# Altium PCB ADCin.PcbDoc
Units mm, origin at the board's own origin, x right, y up, seen from the top; angles counter-clockwise.
Board outline 23.37 x 31.11 mm, 2 copper layers (Top Layer, Bottom Layer), stack 1.271 mm thick; 2 components, 3 nets, 23 pads, 0 vias.
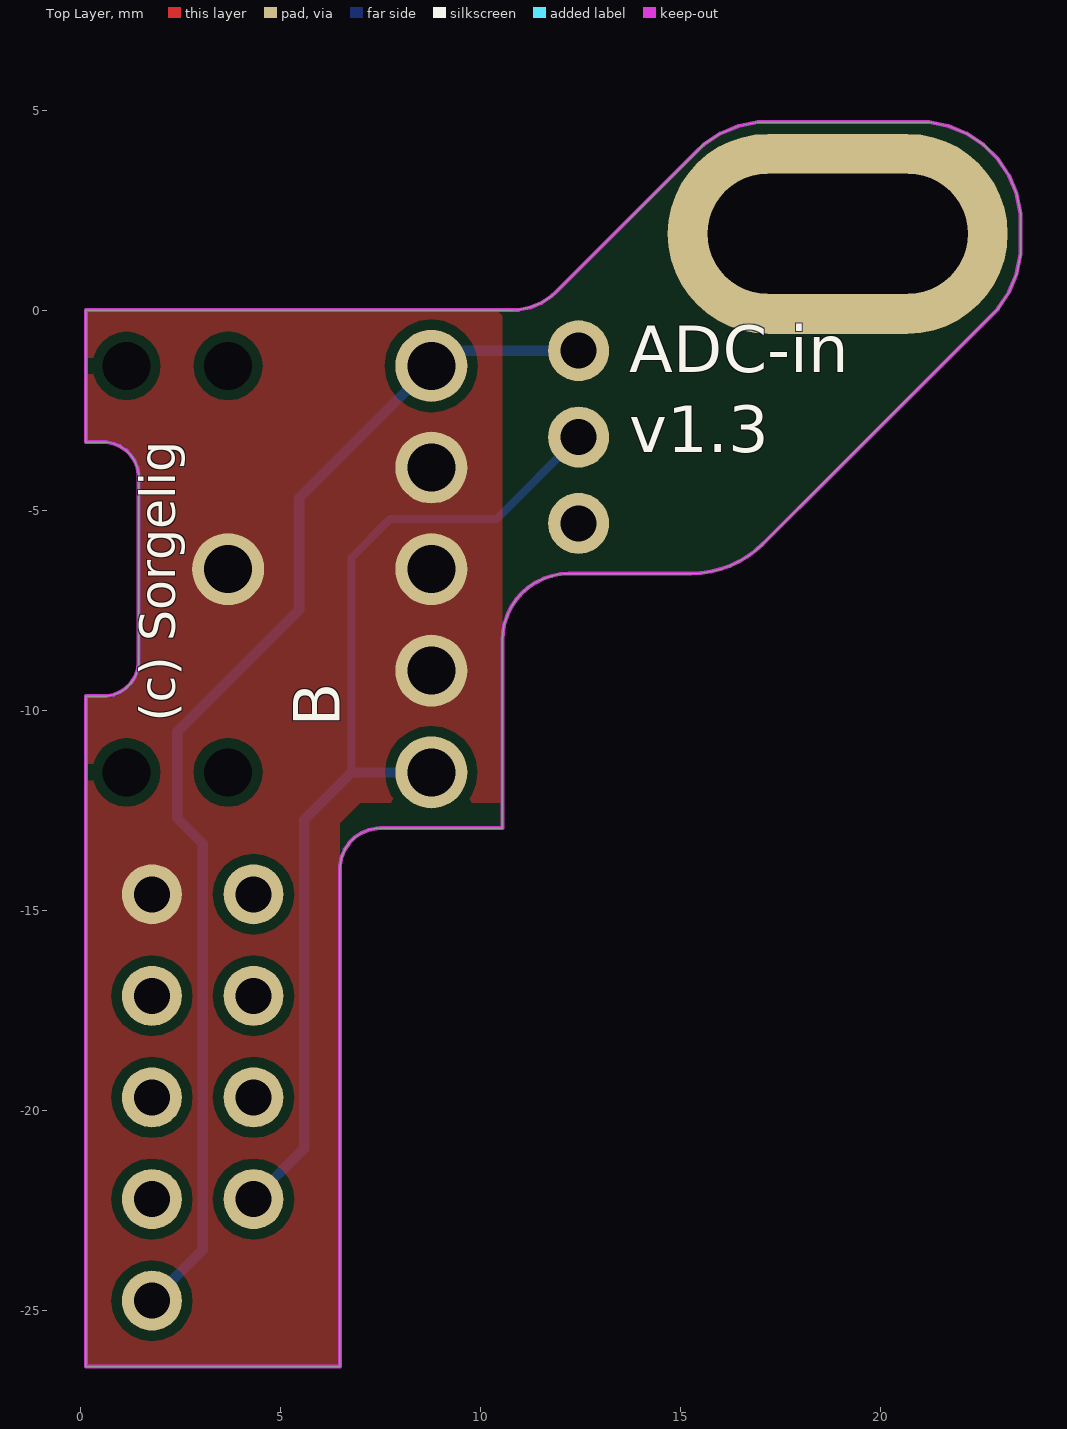
[diagram p0: Top Layer view]
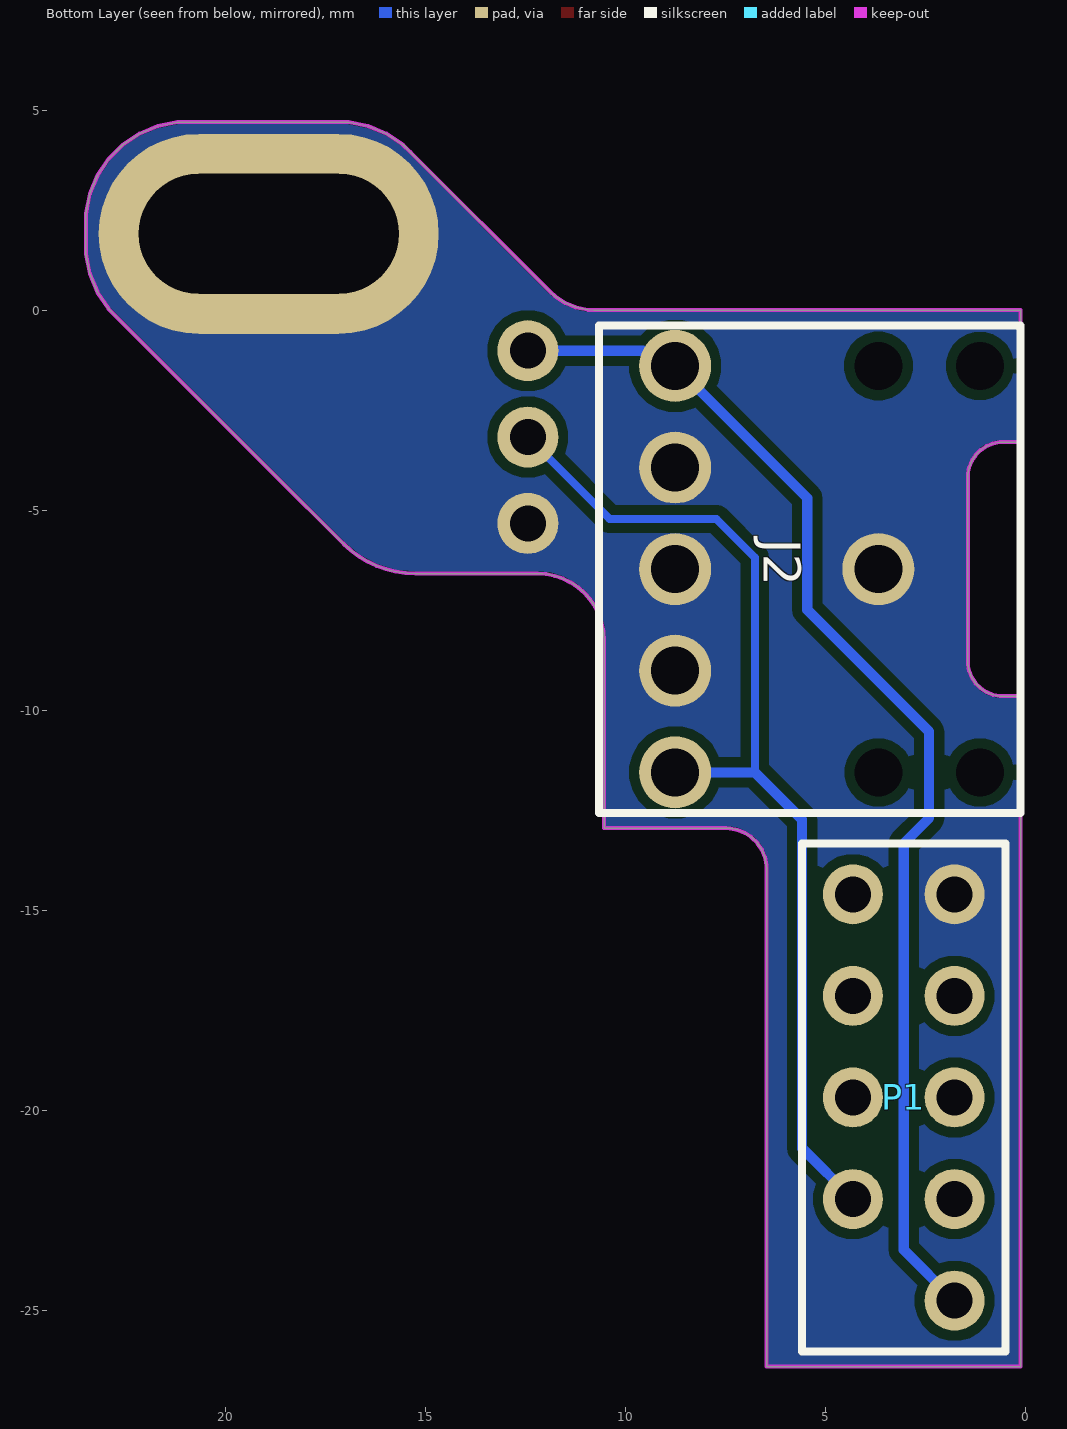
[diagram p1: Bottom Layer view, seen from below]

## Layer stack, top to bottom
Top Solder: solder mask 0.0102, Solder Resist, Dk 3.5
Top Layer: signal copper 0.0356
Dielectric 1: dielectric 1.2, FR-4, Dk 4.8
Bottom Layer: signal copper 0.0356
Bottom Solder: solder mask 0.0102, Solder Resist, Dk 3.5

## Board outline
15.258,-6.586 ccw(c15.258,-4.046) 17.054,-5.842 18.814,-4.082 22.751,-0.145 22.928,0.032 23.206,0.448 23.397,0.91 23.495,1.401 23.495,1.651 23.495,2.159 23.495,2.409 23.397,2.9 23.206,3.362 22.928,3.778 22.574,4.132 22.158,4.41 21.696,4.601 21.205,4.699 20.955,4.699 17.181,4.699 16.931,4.699 16.44,4.601 15.978,4.41 15.562,4.132 15.385,3.955 11.879,0.449 11.768,0.348 11.518,0.181 11.24,0.066 10.945,0.007 10.795,0 0.127,0 0.127,-3.302 0.646,-3.302 0.818,-3.336 0.979,-3.403 1.125,-3.5 1.249,-3.624 1.346,-3.77 1.413,-3.932 1.447,-4.103 1.447,-4.191 1.447,-8.763 1.447,-8.851 1.413,-9.022 1.346,-9.184 1.249,-9.33 1.125,-9.454 0.979,-9.551 0.818,-9.618 0.646,-9.652 0.127,-9.652 0.127,-26.416 6.477,-26.416 6.477,-13.97 6.482,-13.87 6.521,-13.675 6.597,-13.491 6.708,-13.325 6.848,-13.185 7.014,-13.074 7.198,-12.998 7.393,-12.959 7.493,-12.954 10.541,-12.954 10.541,-8.255 cw(c12.21,-8.255) 12.21,-6.586

## Design rules (kind name [scope] priority, off if disabled: settings)
BoardOutlineClearance [All] p1: gap=0 ignorepadtopadclearanceinfootprint=FALSE
Clearance keep-out_Clearance [OnLayer('Keep-Out Layer')] p1: gap=0 ignorepadtopadclearanceinfootprint=TRUE
Clearance [All] p2: gap=0.254 ignorepadtopadclearanceinfootprint=TRUE except(0: Arc-Hole Track-Hole SMDPad-Hole THPad-Hole Via-Hole Fill-Hole Poly-Hole Region-Hole Text-Hole)
ComponentClearance [All] p1 off: gap=0.254 collisioncheckmode=3 verticalgap=0.254 showdistances=FALSE
DiffPairsRouting [All] p1: maxlimit=0.254 minlimit=0.254 mostfreqgap=0.254 toplayer_minwidth=0.381 toplayer_maxwidth=0.381 toplayer_prefwidth=0.381 bottomlayer_minwidth=0.381 bottomlayer_maxwidth=0.381 bottomlayer_prefwidth=0.381 substack1={E4E31694-489D-4C8D-B382-0CE1957CDCA8} toplayer_{e4e31694-489d-4c8d-b382-0ce1957cdca8}_minwidth=0.381 toplayer_{e4e31694-489d-4c8d-b382-0ce1957cdca8}_maxwidth=0.381 toplayer_{e4e31694-489d-4c8d-b382-0ce1957cdca8}_prefwidth=0.381 bottomlayer_{e4e31694-489d-4c8d-b382-0ce1957cdca8}_minwidth=0.381 bottomlayer_{e4e31694-489d-4c8d-b382-0ce1957cdca8}_maxwidth=0.381 bottomlayer_{e4e31694-489d-4c8d-b382-0ce1957cdca8}_prefwidth=0.381 maxuncoupledlength=12.7
Height [All] p1 off: minheight=0 maxheight=25.4 prefheight=12.7
HoleSize [All] p1: absolutevalues=TRUE maxlimit=5 minlimit=0.025 maxpercent=80.000 minpercent=20.000
MinimumSolderMaskSliver [All] p1: minsoldermaskwidth=0.127
PolygonConnect PolygonConnect_comp [HasFootprint('C0805')] p1: connectstyle=Relief reliefconductorwidth=0.508 reliefentries=4 polygonreliefangle="90 Angle" airgapwidth=0.254
PolygonConnect PolygonConnect_comp_2 [HasFootprint('microsd')] p2: connectstyle=Relief reliefconductorwidth=0.508 reliefentries=4 polygonreliefangle="90 Angle" airgapwidth=0.254
PolygonConnect PolygonConnect_comp_3 [HasFootprint('tact 12x12')] p3: connectstyle=Relief reliefconductorwidth=0.508 reliefentries=4 polygonreliefangle="90 Angle" airgapwidth=0.254
PolygonConnect PolygonConnect_comp_1 [HasFootprint('TACT_60X35')] p4: connectstyle=Relief reliefconductorwidth=0.508 reliefentries=4 polygonreliefangle="90 Angle" airgapwidth=0.254
PolygonConnect [All] p5: connectstyle=Direct reliefconductorwidth=0.254 reliefentries=4 polygonreliefangle="90 Angle" airgapwidth=0.254
RoutingVias [All] p1: holewidth=0.4 width=0.9 viastyle="Through Hole" minholewidth=0.4 minwidth=0.9 maxholewidth=0.4 maxwidth=1
SilkToSilkClearance [All] p1 off: silktosilkclearance=0.254
SilkToSolderMaskClearance [IsPad] p1 off: minsilkscreentomaskgap=0.254 clearancetoexposedcopper=TRUE
SolderMaskExpansion SolderMaskExpansion_J1 [InComponent('J1')] p1: expansion=0 istentingtop=FALSE
SolderMaskExpansion [All] p2: expansion=0.051 istentingtop=FALSE
Width Width_power [InNetClass('power')] p1: maxlimit=2 minlimit=0.254 preferedwidth=0.508 substack1={E4E31694-489D-4C8D-B382-0CE1957CDCA8} minimp=50.000000 maximp=50.000000 favimp=50.000000
Width Width_signal [All] p2: maxlimit=0.254 minlimit=0.127 preferedwidth=0.254 substack1={E4E31694-489D-4C8D-B382-0CE1957CDCA8} toplayer_{e4e31694-489d-4c8d-b382-0ce1957cdca8}_minwidth=0.254 bottomlayer_{e4e31694-489d-4c8d-b382-0ce1957cdca8}_minwidth=0.254
23 further rules are at their usual default settings.

## Components (designator, comment, footprint, x,y, rotation, side; value= is the part's Value field where it differs from the comment)
J2 "Audio" phonejack 0.127,-6.477 r270 bottom locked
P1 "Header 5X2" HDR2X5 4.318,-24.765 r90 bottom locked

## Footprints (in the part's own frame and the unit in brackets; to place one, negate y for a bottom-side part, rotate by r counter-clockwise, add the part's x,y. Pads: shape width x height; smd on the part's side, far side on the other; paste and mask are expansions set on the pad)
HDR2X5 [mm] "Connector; Header; 5x2 Position"
  round 1.5 hole 0.9: 2(0,-2.54) 3(2.54,0) 4(2.54,-2.54) 5(5.08,0) 6(5.08,-2.54) 7(7.62,0) 8(7.62,-2.54) 9(10.16,0) 10(10.16,-2.54)
  silkscreen extent -1.27,-3.81 11.43,1.27
phonejack [mm]
  round 1.8 hole 1.2: 1(0,-8.636) 1(0,-3.556) 2(-5.08,-8.636) 3(2.54,-8.636) 4(5.08,-8.636) 5(-2.54,-8.636)
  round 1 hole 1.2 unplated: ""(-5.08,-3.556) ""(-5.08,-1.016) ""(5.08,-3.556) ""(5.08,-1.016)
  silkscreen extent -6.1,-10.54 6.1,0, body extent -6,-11.1 6,2.9, height 5.53

## Part data
J2: library part phonejack
P1: "Header, 5-Pin, Dual row", LatestRevisionDate=17-Jul-2002, LatestRevisionNote="Re-released for DXP Platform.", Publisher="Altium Limited"

## Free pads (board coordinates)
  oval 8.5x5 hole 3 slot 6.5 at 0 deg: 2(18.923,1.905)
  round 1.524 hole 0.9: 4(12.446,-5.334) 4(12.446,-3.175) 4(12.446,-1.016)

## Nets (pads, with @x,y where several pads share a name; then routed paths per layer and width w, separated by ;. In a path a pad name is that pad's centre, name@x,y a point inside that pad or via, vN(x,y) a via of type N, cw(c..) or ccw(c..) an arc to the next point about the centre after c; other vN are vias at no path point)
GND: J2.1 J2.3 J2.5 P1.10 pad.2 pad.4@12.446,-5.334
NetJ2_2: J2.2 P1.2 pad.4@12.446,-1.016 | length 30.6
  Bottom Layer w0.254: P1.2 3.048,-23.495 3.048,-13.335 2.413,-12.7 2.413,-10.541 5.461,-7.493 5.461,-4.699 J2.2 9.181,-1.397 9.562,-1.016 pad.4@12.446,-1.016
NetJ2_4: J2.4 P1.3 pad.4@12.446,-3.175 | length 26
  Bottom Layer w0.2: 6.772,-11.557 6.772,-6.184 7.733,-5.223 10.398,-5.223 pad.4@12.446,-3.175
  Bottom Layer w0.254: P1.3 5.588,-20.955 5.588,-12.741 6.772,-11.557 J2.4
pads on no net: J2. P1.4 P1.5 P1.6 P1.7 P1.8 P1.9

## Polygon pours and split planes (outlines as drawn)
GND on Top Layer "ground" (solid, remove dead copper, pour order 38): 6.477,-12.827 6.985,-12.319 10.541,-12.319 10.541,0 0,0 0,-26.416 6.477,-26.416
GND on Bottom Layer "GND_L02_P039" (solid, remove dead copper, pour order 39): 15.258,-6.586 ccw(c15.258,-4.046) 17.054,-5.842 18.814,-4.082 22.751,-0.145 22.928,0.032 23.206,0.448 23.397,0.91 23.495,1.401 23.495,1.651 23.495,2.159 23.495,2.409 23.397,2.9 23.206,3.362 22.928,3.778 22.574,4.132 22.158,4.41 21.696,4.601 21.205,4.699 20.955,4.699 17.181,4.699 16.931,4.699 16.44,4.601 15.978,4.41 15.562,4.132 15.385,3.955 11.879,0.449 11.768,0.348 11.518,0.181 11.24,0.066 10.945,0.007 10.795,0 0.127,0 0.127,-3.302 0.646,-3.302 0.818,-3.336 0.979,-3.403 1.125,-3.5 1.249,-3.624 1.346,-3.77 1.413,-3.932 1.447,-4.103 1.447,-4.191 1.447,-8.763 1.447,-8.851 1.413,-9.022 1.346,-9.184 1.249,-9.33 1.125,-9.454 0.979,-9.551 0.818,-9.618 0.646,-9.652 0.127,-9.652 0.127,-26.416 6.477,-26.416 6.477,-13.97 6.482,-13.87 6.521,-13.675 6.597,-13.491 6.708,-13.325 6.848,-13.185 7.014,-13.074 7.198,-12.998 7.393,-12.959 7.493,-12.954 10.541,-12.954 10.541,-8.255 cw(c12.21,-8.255) 12.21,-6.586

## Keep-outs
Keep-Out Layer:
  the board outline again, w0.1

## Silkscreen, mask and mechanical layers (free items; w line width, h text height)
Top Overlay:
  text "ADC-in / v1.3" at 13.716,-3.937 h2
  text "(c) Sorgelig" at 2.667,-10.287 h1.52 r90
  text "B" at 6.858,-10.414 h2 r90